# Altium PCB BloopPadMaxx_01.PcbDoc (part 3 of 3)
Units mm, origin at the board's own origin, x right, y up, seen from the top; angles counter-clockwise.
Board outline 209 x 212 mm, 2 copper layers (Top Layer, Bottom Layer), stack 1.571 mm thick; 206 components, 154 nets, 793 pads, 455 vias.
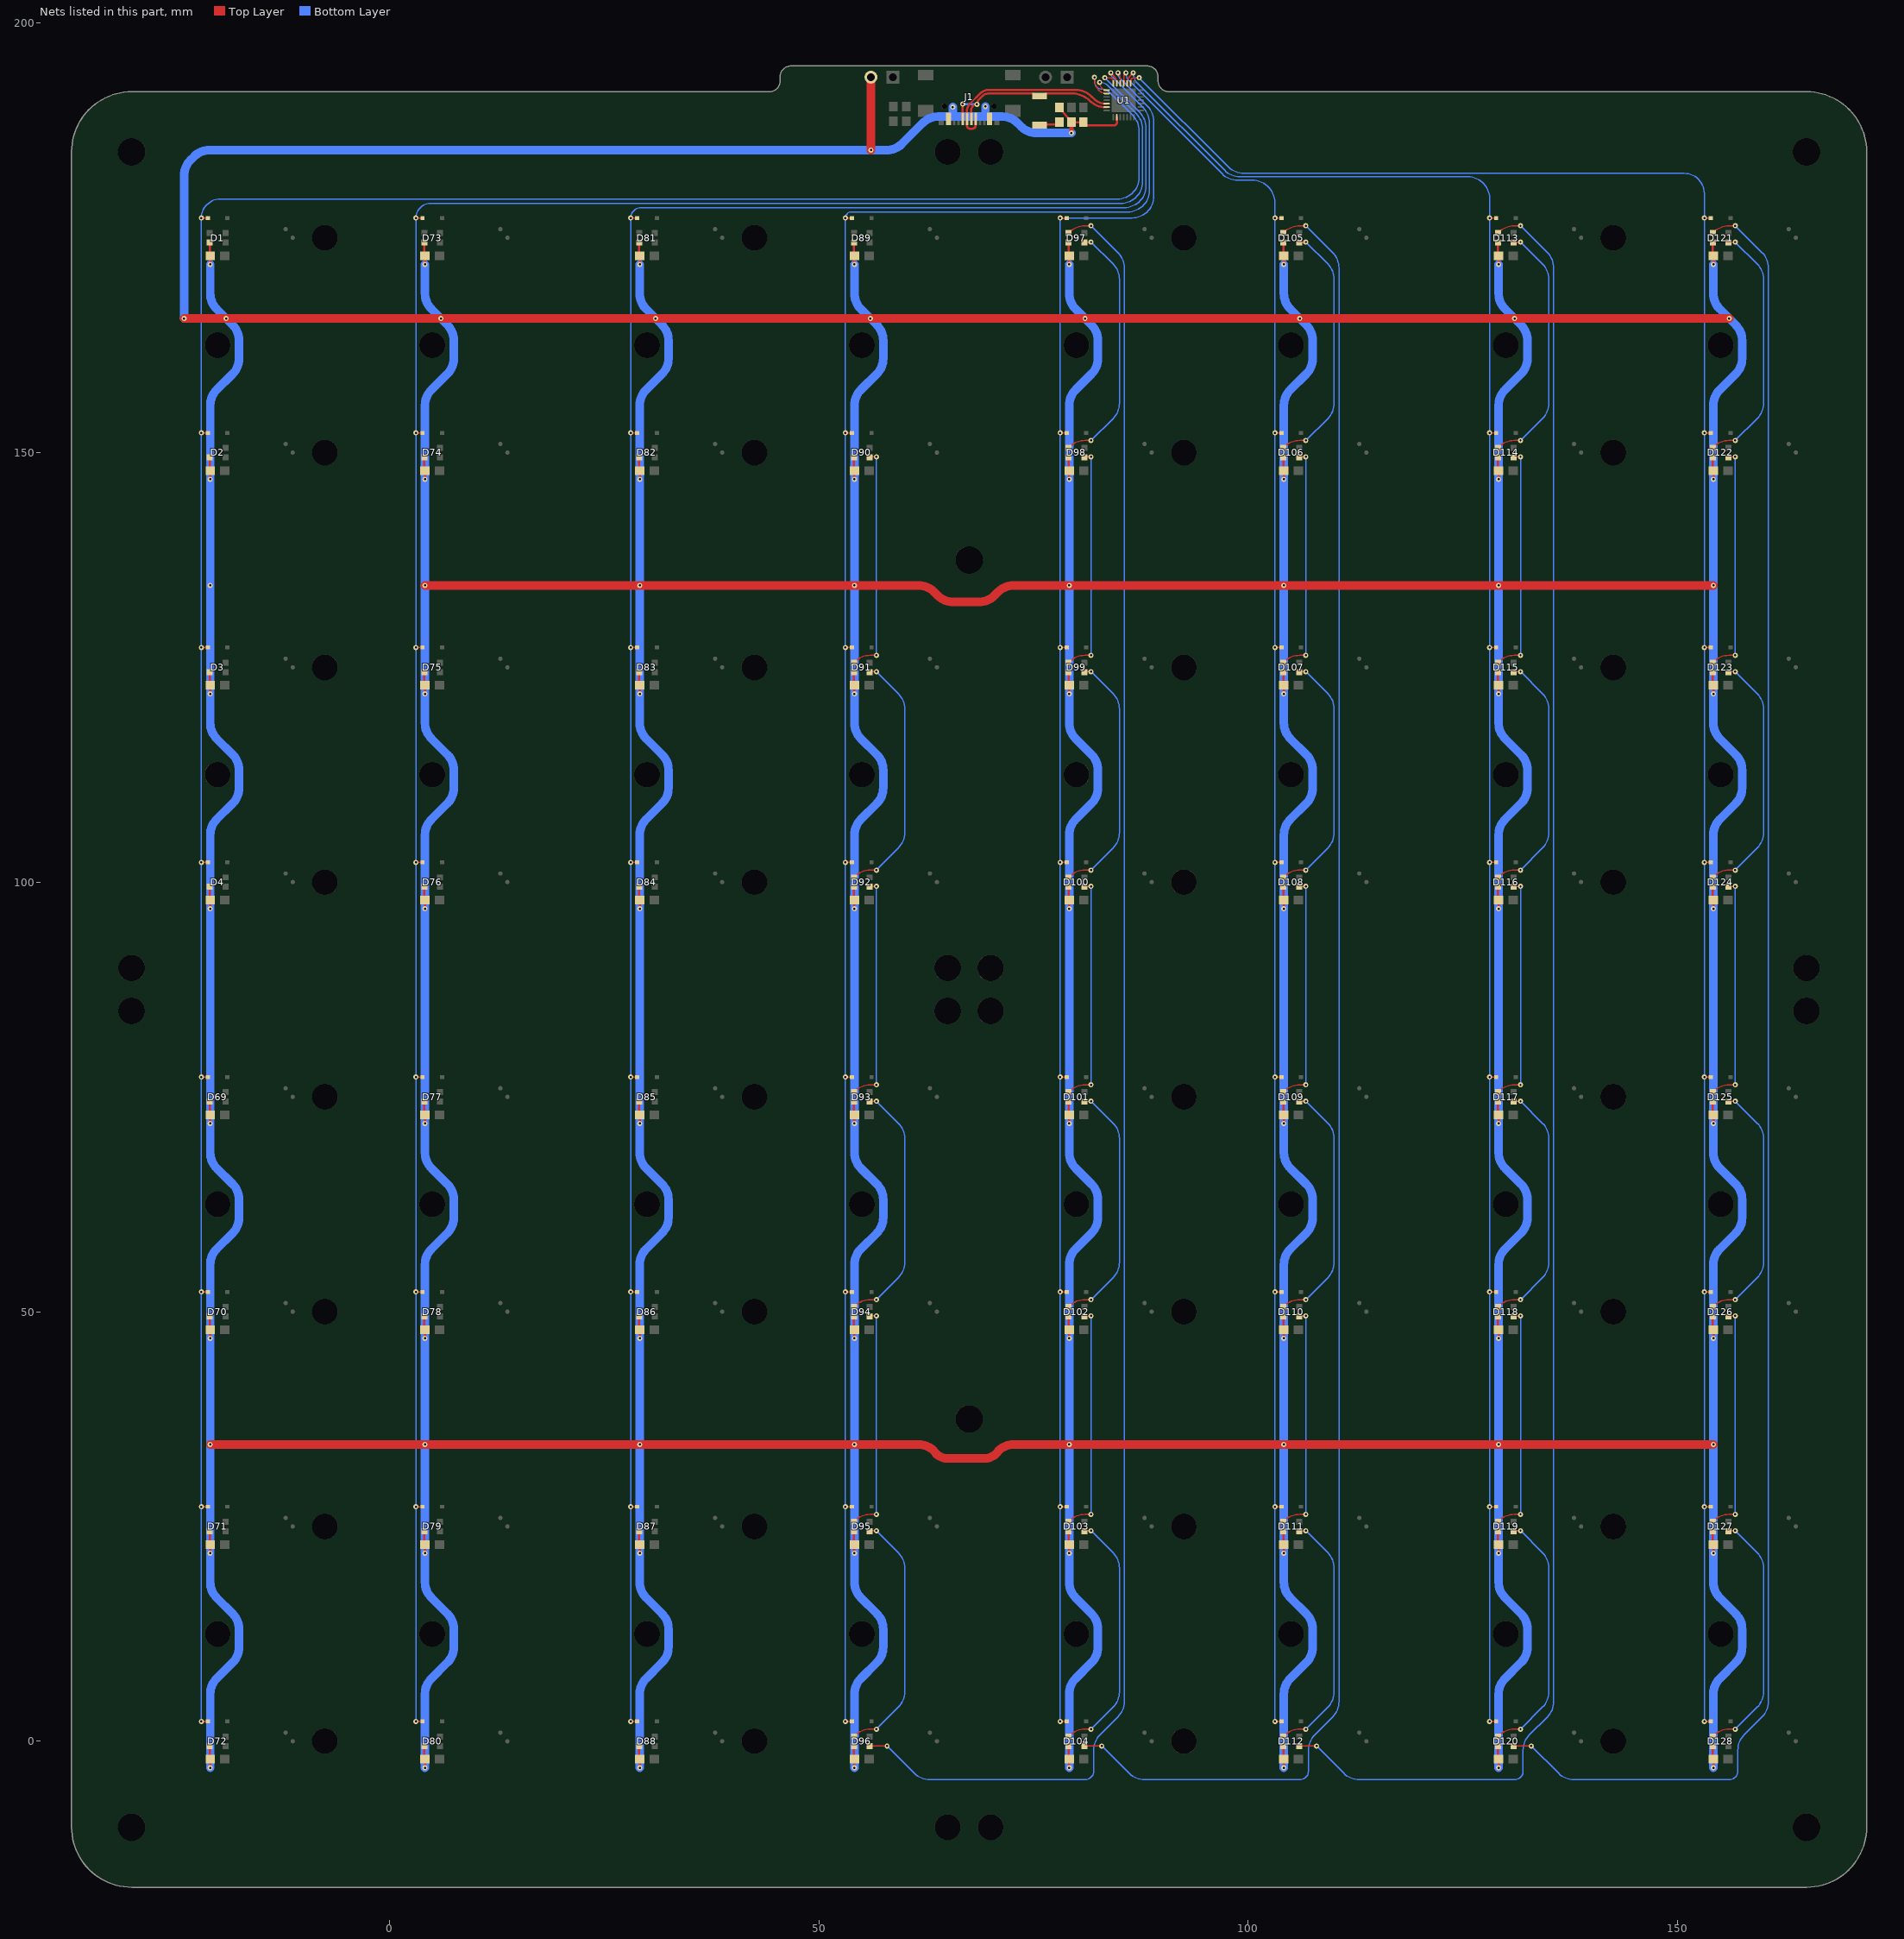
[diagram p3: the nets of this part, all layers, seen from the top]

## Via types
v1: diameter 0.6, hole 0.25, Top Layer to Bottom Layer, 455 vias

## Nets (pads, with @x,y where several pads share a name; then routed paths per layer and width w, separated by ;. In a path a pad name is that pad's centre, name@x,y a point inside that pad or via, vN(x,y) a via of type N, cw(c..) or ccw(c..) an arc to the next point about the centre after c; other vN are vias at no path point) (continued)
NetD90_1: D90.1 D91.3 | length 26.8
  Top Layer w0.15: D91.3@54.085,125.55 54.191,125.656 cw(c55.987,123.86) 55.987,126.4 v1(56.7,126.4) ; D90.1@55.915,149.45 55.965,149.5 v1(56.7,149.5)
  Bottom Layer w0.15: v1(56.7,126.4) v1(56.7,149.5)
NetD91_1: D91.1 D92.3 | length 29.3
  Top Layer w0.15: D92.3@54.085,100.55 54.191,100.656 cw(c55.987,98.86) 55.987,101.4 v1(56.7,101.4) ; D91.1@55.915,124.45 55.965,124.5 v1(56.7,124.5)
  Bottom Layer w0.15: v1(56.7,101.4) 59.256,103.956 ccw(c57.46,105.752) 60,105.752 60,120.148 ccw(c57.46,120.148) 59.256,121.944 v1(56.7,124.5)
NetD92_1: D92.1 D93.3 | length 26.8
  Top Layer w0.15: D93.3@54.085,75.55 54.191,75.656 cw(c55.987,73.86) 55.987,76.4 v1(56.7,76.4) ; D92.1@55.915,99.45 55.965,99.5 v1(56.7,99.5)
  Bottom Layer w0.15: v1(56.7,76.4) v1(56.7,99.5)
NetD93_1: D93.1 D94.3 | length 29.3
  Top Layer w0.15: D94.3@54.085,50.55 54.191,50.656 cw(c55.987,48.86) 55.987,51.4 v1(56.7,51.4) ; D93.1@55.915,74.45 55.965,74.5 v1(56.7,74.5)
  Bottom Layer w0.15: v1(56.7,51.4) 59.256,53.956 ccw(c57.46,55.752) 60,55.752 60,70.148 ccw(c57.46,70.148) 59.256,71.944 v1(56.7,74.5)
NetD94_1: D94.1 D95.3 | length 26.8
  Top Layer w0.15: D95.3@54.085,25.55 54.191,25.656 cw(c55.987,23.86) 55.987,26.4 v1(56.7,26.4) ; D94.1@55.915,49.45 55.965,49.5 v1(56.7,49.5)
  Bottom Layer w0.15: v1(56.7,26.4) v1(56.7,49.5)
NetD95_1: D95.1 D96.3 | length 29.3
  Top Layer w0.15: D96.3@54.085,0.55 54.191,0.656 cw(c55.987,-1.14) 55.987,1.4 v1(56.7,1.4) ; D95.1@55.915,24.45 55.965,24.5 v1(56.7,24.5)
  Bottom Layer w0.15: v1(56.7,1.4) 59.256,3.956 ccw(c57.46,5.752) 60,5.752 60,20.148 ccw(c57.46,20.148) 59.256,21.944 v1(56.7,24.5)
NetD96_1: D96.1 D97.3 | length 216.5
  Top Layer w0.15: D96.1@55.915,-0.55 v1(57.95,-0.55) ; D97.3@79.191,175.656 cw(c80.987,173.86) 80.987,176.4 ; D97.3@79.191,175.656 cw(c80.987,173.86) 80.987,176.4 ; D97.3@79.191,175.656 D97.3@79.085,175.55 D97.3@79.191,175.656 ; 80.987,176.4 v1(81.7,176.4) 80.987,176.4
  Bottom Layer w0.15: v1(57.95,-0.55) 61.122,-3.722 ccw(c62.918,-1.926) 62.918,-4.466 81.034,-4.466 ccw(c81.034,-3.5) 82,-3.5 82,-1.052 cw(c84.54,-1.052) 82.744,0.744 84.816,2.816 ccw(c83.02,4.612) 85.56,4.612 85.56,171.488 ccw(c83.02,171.488) 84.816,173.284 v1(81.7,176.4)
  other v1: 81.7,176.4
NetD97_1: D97.1 D98.3 | length 29.3
  Top Layer w0.15: D98.3@79.085,150.55 79.191,150.656 cw(c80.987,148.86) 80.987,151.4 v1(81.7,151.4) ; D97.1@80.915,174.45 80.965,174.5 v1(81.7,174.5)
  Bottom Layer w0.15: v1(81.7,151.4) 84.256,153.956 ccw(c82.46,155.752) 85,155.752 85,170.148 ccw(c82.46,170.148) 84.256,171.944 v1(81.7,174.5)
NetD98_1: D98.1 D99.3 | length 26.8
  Top Layer w0.15: D99.3@79.085,125.55 79.191,125.656 cw(c80.987,123.86) 80.987,126.4 v1(81.7,126.4) ; D98.1@80.915,149.45 80.965,149.5 v1(81.7,149.5)
  Bottom Layer w0.15: v1(81.7,126.4) v1(81.7,149.5)
NetD99_1: D99.1 D100.3 | length 29.3
  Top Layer w0.15: D100.3@79.085,100.55 79.191,100.656 cw(c80.987,98.86) 80.987,101.4 v1(81.7,101.4) ; D99.1@80.915,124.45 80.965,124.5 v1(81.7,124.5)
  Bottom Layer w0.15: v1(81.7,101.4) 84.256,103.956 ccw(c82.46,105.752) 85,105.752 85,120.148 ccw(c82.46,120.148) 84.256,121.944 v1(81.7,124.5)
NetD100_1: D100.1 D101.3 | length 26.8
  Top Layer w0.15: D101.3@79.085,75.55 79.191,75.656 cw(c80.987,73.86) 80.987,76.4 v1(81.7,76.4) ; D100.1@80.915,99.45 80.965,99.5 v1(81.7,99.5)
  Bottom Layer w0.15: v1(81.7,76.4) v1(81.7,99.5)
NetD101_1: D101.1 D102.3 | length 29.3
  Top Layer w0.15: D102.3@79.085,50.55 79.191,50.656 cw(c80.987,48.86) 80.987,51.4 v1(81.7,51.4) ; D101.1@80.915,74.45 80.965,74.5 v1(81.7,74.5)
  Bottom Layer w0.15: v1(81.7,51.4) 84.256,53.956 ccw(c82.46,55.752) 85,55.752 85,70.148 ccw(c82.46,70.148) 84.256,71.944 v1(81.7,74.5)
NetD102_1: D102.1 D103.3 | length 26.8
  Top Layer w0.15: D103.3@79.085,25.55 79.191,25.656 cw(c80.987,23.86) 80.987,26.4 v1(81.7,26.4) ; D102.1@80.915,49.45 80.965,49.5 v1(81.7,49.5)
  Bottom Layer w0.15: v1(81.7,26.4) v1(81.7,49.5)
NetD103_1: D103.1 D104.3 | length 29.3
  Top Layer w0.15: D104.3@79.085,0.55 79.191,0.656 cw(c80.987,-1.14) 80.987,1.4 v1(81.7,1.4) ; D103.1@80.915,24.45 80.965,24.5 v1(81.7,24.5)
  Bottom Layer w0.15: v1(81.7,1.4) 84.256,3.956 ccw(c82.46,5.752) 85,5.752 85,20.148 ccw(c82.46,20.148) 84.256,21.944 v1(81.7,24.5)
NetD104_1: D104.1 D105.3 | length 216.5
  Top Layer w0.15: D104.1@80.915,-0.55 v1(82.95,-0.55) ; D105.3@104.191,175.656 cw(c105.987,173.86) 105.987,176.4 ; D105.3@104.191,175.656 cw(c105.987,173.86) 105.987,176.4 ; D105.3@104.191,175.656 D105.3@104.085,175.55 D105.3@104.191,175.656 ; 105.987,176.4 v1(106.7,176.4) 105.987,176.4
  Bottom Layer w0.15: v1(82.95,-0.55) 86.122,-3.722 ccw(c87.918,-1.926) 87.918,-4.466 106.034,-4.466 ccw(c106.034,-3.5) 107,-3.5 107,-1.052 cw(c109.54,-1.052) 107.744,0.744 109.816,2.816 ccw(c108.02,4.612) 110.56,4.612 110.56,171.488 ccw(c108.02,171.488) 109.816,173.284 v1(106.7,176.4)
  other v1: 106.7,176.4
NetD105_1: D105.1 D106.3 | length 29.3
  Top Layer w0.15: D106.3@104.085,150.55 104.191,150.656 cw(c105.987,148.86) 105.987,151.4 v1(106.7,151.4) ; D105.1@105.915,174.45 105.965,174.5 v1(106.7,174.5)
  Bottom Layer w0.15: v1(106.7,151.4) 109.256,153.956 ccw(c107.46,155.752) 110,155.752 110,170.148 ccw(c107.46,170.148) 109.256,171.944 v1(106.7,174.5)
NetD106_1: D106.1 D107.3 | length 26.8
  Top Layer w0.15: D107.3@104.085,125.55 104.191,125.656 cw(c105.987,123.86) 105.987,126.4 v1(106.7,126.4) ; D106.1@105.915,149.45 105.965,149.5 v1(106.7,149.5)
  Bottom Layer w0.15: v1(106.7,126.4) v1(106.7,149.5)
NetD107_1: D107.1 D108.3 | length 29.3
  Top Layer w0.15: D108.3@104.085,100.55 104.191,100.656 cw(c105.987,98.86) 105.987,101.4 v1(106.7,101.4) ; D107.1@105.915,124.45 105.965,124.5 v1(106.7,124.5)
  Bottom Layer w0.15: v1(106.7,101.4) 109.256,103.956 ccw(c107.46,105.752) 110,105.752 110,120.148 ccw(c107.46,120.148) 109.256,121.944 v1(106.7,124.5)
NetD108_1: D108.1 D109.3 | length 26.8
  Top Layer w0.15: D109.3@104.085,75.55 104.191,75.656 cw(c105.987,73.86) 105.987,76.4 v1(106.7,76.4) ; D108.1@105.915,99.45 105.965,99.5 v1(106.7,99.5)
  Bottom Layer w0.15: v1(106.7,76.4) v1(106.7,99.5)
NetD109_1: D109.1 D110.3 | length 29.3
  Top Layer w0.15: D110.3@104.085,50.55 104.191,50.656 cw(c105.987,48.86) 105.987,51.4 v1(106.7,51.4) ; D109.1@105.915,74.45 105.965,74.5 v1(106.7,74.5)
  Bottom Layer w0.15: v1(106.7,51.4) 109.256,53.956 ccw(c107.46,55.752) 110,55.752 110,70.148 ccw(c107.46,70.148) 109.256,71.944 v1(106.7,74.5)
NetD110_1: D110.1 D111.3 | length 26.8
  Top Layer w0.15: D111.3@104.085,25.55 104.191,25.656 cw(c105.987,23.86) 105.987,26.4 v1(106.7,26.4) ; D110.1@105.915,49.45 105.965,49.5 v1(106.7,49.5)
  Bottom Layer w0.15: v1(106.7,26.4) v1(106.7,49.5)
NetD111_1: D111.1 D112.3 | length 29.3
  Top Layer w0.15: D112.3@104.085,0.55 104.191,0.656 cw(c105.987,-1.14) 105.987,1.4 v1(106.7,1.4) ; D111.1@105.915,24.45 105.965,24.5 v1(106.7,24.5)
  Bottom Layer w0.15: v1(106.7,1.4) 109.256,3.956 ccw(c107.46,5.752) 110,5.752 110,20.148 ccw(c107.46,20.148) 109.256,21.944 v1(106.7,24.5)
NetD112_1: D112.1 D113.3 | length 216.5
  Top Layer w0.15: D112.1@105.915,-0.55 v1(107.95,-0.55) ; D113.3@129.191,175.656 cw(c130.987,173.86) 130.987,176.4 ; D113.3@129.191,175.656 cw(c130.987,173.86) 130.987,176.4 ; D113.3@129.191,175.656 D113.3@129.085,175.55 D113.3@129.191,175.656 ; 130.987,176.4 v1(131.7,176.4) 130.987,176.4
  Bottom Layer w0.15: v1(107.95,-0.55) 111.122,-3.722 ccw(c112.918,-1.926) 112.918,-4.466 131.034,-4.466 ccw(c131.034,-3.5) 132,-3.5 132,-1.052 cw(c134.54,-1.052) 132.744,0.744 134.816,2.816 ccw(c133.02,4.612) 135.56,4.612 135.56,171.488 ccw(c133.02,171.488) 134.816,173.284 v1(131.7,176.4)
  other v1: 131.7,176.4
NetD113_1: D113.1 D114.3 | length 29.3
  Top Layer w0.15: D114.3@129.085,150.55 129.191,150.656 cw(c130.987,148.86) 130.987,151.4 v1(131.7,151.4) ; D113.1@130.915,174.45 130.965,174.5 v1(131.7,174.5)
  Bottom Layer w0.15: v1(131.7,151.4) 134.256,153.956 ccw(c132.46,155.752) 135,155.752 135,170.148 ccw(c132.46,170.148) 134.256,171.944 v1(131.7,174.5)
NetD114_1: D114.1 D115.3 | length 26.8
  Top Layer w0.15: D115.3@129.085,125.55 129.191,125.656 cw(c130.987,123.86) 130.987,126.4 v1(131.7,126.4) ; D114.1@130.915,149.45 130.965,149.5 v1(131.7,149.5)
  Bottom Layer w0.15: v1(131.7,126.4) v1(131.7,149.5)
NetD115_1: D115.1 D116.3 | length 29.3
  Top Layer w0.15: D116.3@129.085,100.55 129.191,100.656 cw(c130.987,98.86) 130.987,101.4 v1(131.7,101.4) ; D115.1@130.915,124.45 130.965,124.5 v1(131.7,124.5)
  Bottom Layer w0.15: v1(131.7,101.4) 134.256,103.956 ccw(c132.46,105.752) 135,105.752 135,120.148 ccw(c132.46,120.148) 134.256,121.944 v1(131.7,124.5)
NetD116_1: D116.1 D117.3 | length 26.8
  Top Layer w0.15: D117.3@129.085,75.55 129.191,75.656 cw(c130.987,73.86) 130.987,76.4 v1(131.7,76.4) ; D116.1@130.915,99.45 130.965,99.5 v1(131.7,99.5)
  Bottom Layer w0.15: v1(131.7,76.4) v1(131.7,99.5)
NetD117_1: D117.1 D118.3 | length 29.3
  Top Layer w0.15: D118.3@129.085,50.55 129.191,50.656 cw(c130.987,48.86) 130.987,51.4 v1(131.7,51.4) ; D117.1@130.915,74.45 130.965,74.5 v1(131.7,74.5)
  Bottom Layer w0.15: v1(131.7,51.4) 134.256,53.956 ccw(c132.46,55.752) 135,55.752 135,70.148 ccw(c132.46,70.148) 134.256,71.944 v1(131.7,74.5)
NetD118_1: D118.1 D119.3 | length 26.8
  Top Layer w0.15: D119.3@129.085,25.55 129.191,25.656 cw(c130.987,23.86) 130.987,26.4 v1(131.7,26.4) ; D118.1@130.915,49.45 130.965,49.5 v1(131.7,49.5)
  Bottom Layer w0.15: v1(131.7,26.4) v1(131.7,49.5)
NetD119_1: D119.1 D120.3 | length 29.3
  Top Layer w0.15: D120.3@129.085,0.55 129.191,0.656 cw(c130.987,-1.14) 130.987,1.4 v1(131.7,1.4) ; D119.1@130.915,24.45 130.965,24.5 v1(131.7,24.5)
  Bottom Layer w0.15: v1(131.7,1.4) 134.256,3.956 ccw(c132.46,5.752) 135,5.752 135,20.148 ccw(c132.46,20.148) 134.256,21.944 v1(131.7,24.5)
NetD120_1: D120.1 D121.3 | length 216.5
  Top Layer w0.15: D120.1@130.915,-0.55 v1(132.95,-0.55) ; D121.3@154.191,175.656 cw(c155.987,173.86) 155.987,176.4 ; D121.3@154.191,175.656 cw(c155.987,173.86) 155.987,176.4 ; D121.3@154.191,175.656 D121.3@154.085,175.55 D121.3@154.191,175.656 ; 155.987,176.4 v1(156.7,176.4) 155.987,176.4
  Bottom Layer w0.15: v1(132.95,-0.55) 136.122,-3.722 ccw(c137.918,-1.926) 137.918,-4.466 156.034,-4.466 ccw(c156.034,-3.5) 157,-3.5 157,-1.052 cw(c159.54,-1.052) 157.744,0.744 159.816,2.816 ccw(c158.02,4.612) 160.56,4.612 160.56,171.488 ccw(c158.02,171.488) 159.816,173.284 v1(156.7,176.4)
  other v1: 156.7,176.4
NetD121_1: D121.1 D122.3 | length 29.3
  Top Layer w0.15: D122.3@154.085,150.55 154.191,150.656 cw(c155.987,148.86) 155.987,151.4 v1(156.7,151.4) ; D121.1@155.915,174.45 155.965,174.5 v1(156.7,174.5)
  Bottom Layer w0.15: v1(156.7,151.4) 159.256,153.956 ccw(c157.46,155.752) 160,155.752 160,170.148 ccw(c157.46,170.148) 159.256,171.944 v1(156.7,174.5)
NetD122_1: D122.1 D123.3 | length 26.8
  Top Layer w0.15: D123.3@154.085,125.55 154.191,125.656 cw(c155.987,123.86) 155.987,126.4 v1(156.7,126.4) ; D122.1@155.915,149.45 155.965,149.5 v1(156.7,149.5)
  Bottom Layer w0.15: v1(156.7,126.4) v1(156.7,149.5)
NetD123_1: D123.1 D124.3 | length 29.3
  Top Layer w0.15: D124.3@154.085,100.55 154.191,100.656 cw(c155.987,98.86) 155.987,101.4 v1(156.7,101.4) ; D123.1@155.915,124.45 155.965,124.5 v1(156.7,124.5)
  Bottom Layer w0.15: v1(156.7,101.4) 159.256,103.956 ccw(c157.46,105.752) 160,105.752 160,120.148 ccw(c157.46,120.148) 159.256,121.944 v1(156.7,124.5)
NetD124_1: D124.1 D125.3 | length 26.8
  Top Layer w0.15: D125.3@154.085,75.55 154.191,75.656 cw(c155.987,73.86) 155.987,76.4 v1(156.7,76.4) ; D124.1@155.915,99.45 155.965,99.5 v1(156.7,99.5)
  Bottom Layer w0.15: v1(156.7,76.4) v1(156.7,99.5)
NetD125_1: D125.1 D126.3 | length 29.3
  Top Layer w0.15: D126.3@154.085,50.55 154.191,50.656 cw(c155.987,48.86) 155.987,51.4 v1(156.7,51.4) ; D125.1@155.915,74.45 155.965,74.5 v1(156.7,74.5)
  Bottom Layer w0.15: v1(156.7,51.4) 159.256,53.956 ccw(c157.46,55.752) 160,55.752 160,70.148 ccw(c157.46,70.148) 159.256,71.944 v1(156.7,74.5)
NetD126_1: D126.1 D127.3 | length 26.8
  Top Layer w0.15: D127.3@154.085,25.55 154.191,25.656 cw(c155.987,23.86) 155.987,26.4 v1(156.7,26.4) ; D126.1@155.915,49.45 155.965,49.5 v1(156.7,49.5)
  Bottom Layer w0.15: v1(156.7,26.4) v1(156.7,49.5)
NetD127_1: D127.1 D128.3 | length 29.3
  Top Layer w0.15: D128.3@154.085,0.55 154.191,0.656 cw(c155.987,-1.14) 155.987,1.4 v1(156.7,1.4) ; D127.1@155.915,24.45 155.965,24.5 v1(156.7,24.5)
  Bottom Layer w0.15: v1(156.7,1.4) 159.256,3.956 ccw(c157.46,5.752) 160,5.752 160,20.148 ccw(c157.46,20.148) 159.256,21.944 v1(156.7,24.5)
NetR1_2: R1.2 SW1.1 | length 2.6
  Top Layer w0.25: SW1.1@75.7,188.1 75.8,188.2 78,188.2 R1.2@78,188.45
ROW0: D17.A D18.A D33.A D34.A D49.A D50.A D65.A D66.A U1.23 | length 309.8
  Top Layer w0.15: v1(-21.9,2.3) D66.A@-21.14,2.3 ; v1(-21.9,27.3) D50.A@-21.14,27.3 ; v1(-21.9,52.3) D34.A@-21.14,52.3 ; v1(-21.9,77.3) D18.A@-21.14,77.3 ; v1(-21.9,102.3) D65.A@-21.14,102.3 ; v1(-21.9,127.3) D49.A@-21.14,127.3 ; v1(-21.9,152.3) D33.A@-21.14,152.3 ; v1(-21.9,177.3) D17.A@-21.14,177.3 ; v1(82.1,193.679) 82.1,193.469 ccw(c84.041,193.469) 82.669,192.096 ccw(c83.384,192.811) 83.384,191.8 U1.23@83.525,191.8 U1.23@83.6,191.8
  Bottom Layer w0.15: v1(-21.9,2.3) v1(-21.9,27.3) v1(-21.9,52.3) v1(-21.9,77.3) v1(-21.9,102.3) v1(-21.9,127.3) v1(-21.9,152.3) v1(-21.9,177.3) cw(c-19.7,177.3) -19.7,179.5 70.948,179.5 84.76,179.5 ccw(c84.76,182.04) 87.3,182.04 87.3,185.04 87.3,187.448 ccw(c84.76,187.448) 86.556,189.244 83.936,191.864 ccw(c82.826,190.753) 82.826,192.323 cw(c82.826,192.926) 82.4,192.5 cw(c83.124,193.224) 82.1,193.224 v1(82.1,193.679)
ROW1: D13.A D14.A D29.A D30.A D45.A D46.A D61.A D62.A U1.22 | length 283.4
  Top Layer w0.15: v1(3.1,2.3) D62.A@3.86,2.3 ; v1(3.1,27.3) D46.A@3.86,27.3 ; v1(3.1,52.3) D30.A@3.86,52.3 ; v1(3.1,77.3) D14.A@3.86,77.3 ; v1(3.1,102.3) D61.A@3.86,102.3 ; v1(3.1,127.3) D45.A@3.86,127.3 ; v1(3.1,152.3) D29.A@3.86,152.3 ; v1(3.1,177.3) D13.A@3.86,177.3 ; v1(82.7,193.1) 82.7,193.003 ccw(c83.487,193.003) 82.93,192.446 ccw(c83.525,193.041) U1.22@83.525,192.2
  Bottom Layer w0.15: v1(3.1,2.3) v1(3.1,27.3) v1(3.1,52.3) v1(3.1,77.3) v1(3.1,102.3) v1(3.1,127.3) v1(3.1,152.3) v1(3.1,177.3) cw(c4.8,177.3) 4.8,179 71.448,179 85.16,179 ccw(c85.16,181.54) 87.7,181.54 87.7,184.64 87.7,187.648 ccw(c85.16,187.648) 86.956,189.444 83.983,192.417 83.724,192.676 ccw(c82.7,191.651) v1@82.804,193.096 ; v1@82.804,193.096 ccw(c82.7,191.651) v1(82.7,193.1) 82.8,193.1 v1@82.804,193.096
ROW2: D9.A D10.A D25.A D26.A D41.A D42.A D57.A D58.A U1.21 | length 259.2
  Top Layer w0.15: v1(28.1,2.3) D58.A@28.86,2.3 ; v1(28.1,27.3) D42.A@28.86,27.3 ; v1(28.1,52.3) D26.A@28.86,52.3 ; v1(28.1,77.3) D10.A@28.86,77.3 ; v1(28.1,102.3) D57.A@28.86,102.3 ; v1(28.1,127.3) D41.A@28.86,127.3 ; v1(28.1,152.3) D25.A@28.86,152.3 ; v1(28.1,177.3) D9.A@28.86,177.3 ; v1(83.297,193.631) 83.853,193.631 cw(c83.853,193.184) 84.3,193.184 U1.21@84.3,192.975
  Bottom Layer w0.15: v1(28.1,2.3) v1(28.1,27.3) v1(28.1,52.3) v1(28.1,77.3) v1(28.1,102.3) v1(28.1,127.3) v1(28.1,152.3) v1(28.1,177.3) cw(c29.3,177.3) 29.3,178.5 85.56,178.5 ccw(c85.56,181.04) 88.1,181.04 88.1,187.775 ccw(c85.56,187.775) 87.356,189.571 v1(83.297,193.631)
ROW3: D5.A D6.A D21.A D22.A D37.A D38.A D53.A D54.A U1.20 | length 235.2
  Top Layer w0.15: v1(53.1,2.3) D54.A@53.86,2.3 ; v1(53.1,27.3) D38.A@53.86,27.3 ; v1(53.1,52.3) D22.A@53.86,52.3 ; v1(53.1,77.3) D6.A@53.86,77.3 ; v1(53.1,102.3) D53.A@53.86,102.3 ; v1(53.1,127.3) D37.A@53.86,127.3 ; v1(53.1,152.3) D21.A@53.86,152.3 ; v1(53.1,177.3) D5.A@53.86,177.3 ; v1(84,194.2) 84.329,193.871 cw(c83.433,192.975) U1.20@84.7,192.975
  Bottom Layer w0.15: v1(53.1,2.3) v1(53.1,27.3) v1(53.1,52.3) v1(53.1,77.3) v1(53.1,102.3) v1(53.1,127.3) v1(53.1,152.3) v1(53.1,177.3) cw(c53.8,177.3) 53.8,178 85.96,178 ccw(c85.96,180.54) 88.5,180.54 88.5,188.348 ccw(c85.96,188.348) 87.756,190.144 84.212,193.688 cw(c84.724,194.2) v1(84,194.2)
ROW4: D19.A D20.A D35.A D36.A D51.A D52.A D67.A D68.A U1.19 | length 210.6
  Top Layer w0.15: v1(78.1,2.3) D68.A@78.86,2.3 ; v1(78.1,27.3) D52.A@78.86,27.3 ; v1(78.1,52.3) D36.A@78.86,52.3 ; v1(78.1,77.3) D20.A@78.86,77.3 ; v1(78.1,102.3) D67.A@78.86,102.3 ; v1(78.1,127.3) D51.A@78.86,127.3 ; v1(78.1,152.3) D35.A@78.86,152.3 ; v1(78.1,177.3) D19.A@78.86,177.3 ; v1(84.839,194.196) cw(c84.208,193.566) 85.1,193.566 U1.19@85.1,192.975
  Bottom Layer w0.15: v1(78.1,2.3) v1(78.1,27.3) v1(78.1,52.3) v1(78.1,77.3) v1(78.1,102.3) v1(78.1,127.3) v1(78.1,152.3) v1(78.1,177.3) 86.46,177.3 ccw(c86.46,179.84) 89,179.84 89,188.548 ccw(c86.46,188.548) 88.256,190.344 85.146,193.454 cw(c85.889,194.196) v1(84.839,194.196)
ROW5: D15.A D16.A D31.A D32.A D47.A D48.A D63.A D64.A U1.18 | length 208.3
  Top Layer w0.15: U1.18@85.5,192.975 85.5,193.566 cw(c86.392,193.566) v1(85.761,194.196) ; v1(103.1,2.3) D64.A@103.86,2.3 ; v1(103.1,27.3) D48.A@103.86,27.3 ; v1(103.1,52.3) D32.A@103.86,52.3 ; v1(103.1,77.3) D16.A@103.86,77.3 ; v1(103.1,102.3) D63.A@103.86,102.3 ; v1(103.1,127.3) D47.A@103.86,127.3 ; v1(103.1,152.3) D31.A@103.86,152.3 ; v1(103.1,177.3) D15.A@103.86,177.3
  Bottom Layer w0.15: v1(85.761,194.196) ccw(c87.107,194.196) 86.156,193.244 96.956,182.444 ccw(c98.752,184.24) 98.752,181.7 100.46,181.7 cw(c100.46,179.06) 103.1,179.06 v1(103.1,177.3) v1(103.1,152.3) v1(103.1,127.3) v1(103.1,102.3) v1(103.1,77.3) v1(103.1,52.3) v1(103.1,27.3) v1(103.1,2.3)
ROW6: D11.A D12.A D27.A D28.A D43.A D44.A D59.A D60.A U1.17 | length 233
  Top Layer w0.15: U1.17@85.9,192.975 cw(c87.167,192.975) 86.271,193.871 v1(86.6,194.2) ; v1(128.1,2.3) D60.A@128.86,2.3 ; v1(128.1,27.3) D44.A@128.86,27.3 ; v1(128.1,52.3) D28.A@128.86,52.3 ; v1(128.1,77.3) D12.A@128.86,77.3 ; v1(128.1,102.3) D59.A@128.86,102.3 ; v1(128.1,127.3) D43.A@128.86,127.3 ; v1(128.1,152.3) D27.A@128.86,152.3 ; v1(128.1,177.3) D11.A@128.86,177.3
  Bottom Layer w0.15: v1(86.6,194.2) ccw(c88.304,194.2) 87.099,192.995 97.25,182.844 ccw(c99.046,184.64) 99.046,182.1 99.791,182.1 125.56,182.1 cw(c125.56,179.56) 128.1,179.56 v1(128.1,177.3) v1(128.1,152.3) v1(128.1,127.3) v1(128.1,102.3) v1(128.1,77.3) v1(128.1,52.3) v1(128.1,27.3) v1(128.1,2.3)
ROW7: D7.A D8.A D23.A D24.A D39.A D40.A D55.A D56.A U1.16 | length 257
  Top Layer w0.15: U1.16@86.3,192.975 86.3,193.184 cw(c86.747,193.184) 86.747,193.631 v1(87.303,193.631) ; v1(153.1,2.3) D56.A@153.86,2.3 ; v1(153.1,27.3) D40.A@153.86,27.3 ; v1(153.1,52.3) D24.A@153.86,52.3 ; v1(153.1,77.3) D8.A@153.86,77.3 ; v1(153.1,102.3) D55.A@153.86,102.3 ; v1(153.1,127.3) D39.A@153.86,127.3 ; v1(153.1,152.3) D23.A@153.86,152.3 ; v1(153.1,177.3) D7.A@153.86,177.3
  Bottom Layer w0.15: v1(87.303,193.631) 97.69,183.244 ccw(c99.486,185.04) 99.486,182.5 102.024,182.5 150.76,182.5 cw(c150.76,180.16) 153.1,180.16 v1(153.1,177.3) v1(153.1,152.3) v1(153.1,127.3) v1(153.1,102.3) v1(153.1,77.3) v1(153.1,52.3) v1(153.1,27.3) v1(153.1,2.3)
USB.D_n: J1.A7 J1.B7 U1.26 | length 21.8
  Top Layer w0.25: J1.B7@68.25,188.853 68.25,188.05 cw(c67.9,188.05) 67.9,187.7 67.6,187.7 cw(c67.6,188.05) 67.25,188.05 J1.A7@67.25,188.853 67.25,189.703 cw(c68.587,189.703) 67.642,190.648 68.804,191.811 cw(c69.731,190.884) 69.731,192.195 79.934,192.195 cw(c79.934,189.655) 81.73,191.451 81.775,191.406 cw(c79.621,188.821) 82,191.2 ccw(c83.449,192.649) 83.449,190.6 U1.26@83.525,190.6
USB.D_p: J1.A6 J1.B6 SW1.2 U1.27 | length 21.8
  Top Layer w0.25: J1.B6@66.75,188.853 v1(66.75,190.55) ; J1.A6@67.75,188.853 67.75,189.886 cw(c68.4,189.886) v1(68.4,190.536) cw(c69.136,190.536) 68.616,191.056 69.087,191.528 cw(c69.709,190.906) 69.709,191.785 74.975,191.785 74.975,191.775 75.25,191.5 76.15,191.5 76.445,191.795 79.503,191.795 cw(c79.503,188.89) 81.556,190.944 ccw(c83.352,192.74) 83.352,190.2 U1.27@83.525,190.2
  Bottom Layer w0.25: v1(66.75,190.55) ccw(c66.784,190.584) 66.784,190.536 v1(68.4,190.536)
VUSB: C1.1 C2.1 C3.1 C4.1 C5.1 C6.1 C7.1 C8.1 C9.1 C10.1 C11.1 C12.1 C13.1 C14.1 C15.1 C16.1 C17.1 C18.1 C19.1 C20.1 C21.1 C22.1 C23.1 C24.1 C25.1 C26.1 C27.1 C28.1 C29.1 C30.1 C31.1 C32.1 C33.1 C34.1 C35.1 C36.1 C37.1 C38.1 C39.1 C40.1 C41.1 C42.1 C43.1 C44.1 C45.1 C46.1 C47.1 C48.1 C49.1 C50.1 C51.1 C52.1 C53.1 C54.1 C55.1 C56.1 C57.1 C58.1 C59.1 C60.1 C61.1 C62.1 C63.1 C64.1 C65.1 C66.1 D1.4 D2.4 D3.4 D4.4 D69.4 D70.4 D71.4 D72.4 D73.4 D74.4 D75.4 D76.4 D77.4 D78.4 D79.4 D80.4 D81.4 D82.4 D83.4 D84.4 D85.4 D86.4 D87.4 D88.4 D89.4 D90.4 D91.4 D92.4 D93.4 D94.4 D95.4 D96.4 D97.4 D98.4 D99.4 D100.4 D101.4 D102.4 D103.4 D104.4 D105.4 D106.4 D107.4 D108.4 D109.4 D110.4 D111.4 D112.4 D113.4 D114.4 D115.4 D116.4 D117.4 D118.4 D119.4 D120.4 D121.4 D122.4 D123.4 D124.4 D125.4 D126.4 D127.4 D128.4 J1.A4 J1.A9 J1.B4 J1.B9 P2.2 R1.1 U1.2 | length 2291.5
  Top Layer w0.25: D72.4@-20.915,-0.55 -20.915,-2.035 ccw(c-20.85,-2.035) C59.1@-20.85,-2.1 v1(-20.85,-3.1) ; D71.4@-20.915,24.45 -20.915,22.965 ccw(c-20.85,22.965) C51.1@-20.85,22.9 v1(-20.85,21.9) ; D70.4@-20.915,49.45 -20.915,47.965 ccw(c-20.85,47.965) C43.1@-20.85,47.9 v1(-20.85,46.9) ; D69.4@-20.915,74.45 -20.915,72.965 ccw(c-20.85,72.965) C35.1@-20.85,72.9 v1(-20.85,71.9) ; D4.4@-20.915,99.45 -20.915,97.965 ccw(c-20.85,97.965) C27.1@-20.85,97.9 v1(-20.85,96.9) ; D3.4@-20.915,124.45 -20.915,122.965 ccw(c-20.85,122.965) C19.1@-20.85,122.9 v1(-20.85,121.9) ; D2.4@-20.915,149.45 -20.915,147.965 ccw(c-20.85,147.965) C9.1@-20.85,147.9 v1(-20.85,146.9) ; D1.4@-20.915,174.45 -20.915,172.965 ccw(c-20.85,172.965) C1.1@-20.85,172.9 v1(-20.85,171.9) ; D80.4@4.085,-0.55 4.085,-2.035 ccw(c4.15,-2.035) C60.1@4.15,-2.1 v1(4.15,-3.1) ; D79.4@4.085,24.45 4.085,22.965 ccw(c4.15,22.965) C52.1@4.15,22.9 v1(4.15,21.9) ; D78.4@4.085,49.45 4.085,47.965 ccw(c4.15,47.965) C44.1@4.15,47.9 v1(4.15,46.9) ; D77.4@4.085,74.45 4.085,72.965 ccw(c4.15,72.965) C36.1@4.15,72.9 v1(4.15,71.9) ; D76.4@4.085,99.45 4.085,97.965 ccw(c4.15,97.965) C28.1@4.15,97.9 v1(4.15,96.9) ; D75.4@4.085,124.45 4.085,122.965 ccw(c4.15,122.965) C20.1@4.15,122.9 v1(4.15,121.9) ; D74.4@4.085,149.45 4.085,147.965 ccw(c4.15,147.965) C10.1@4.15,147.9 v1(4.15,146.9) ; D73.4@4.085,174.45 4.085,172.965 ccw(c4.15,172.965) C2.1@4.15,172.9 v1(4.15,171.9) ; D88.4@29.085,-0.55 29.085,-2.035 ccw(c29.15,-2.035) C61.1@29.15,-2.1 v1(29.15,-3.1) ; D87.4@29.085,24.45 29.085,22.965 ccw(c29.15,22.965) C53.1@29.15,22.9 v1(29.15,21.9) ; D86.4@29.085,49.45 29.085,47.965 ccw(c29.15,47.965) C45.1@29.15,47.9 v1(29.15,46.9) ; D85.4@29.085,74.45 29.085,72.965 ccw(c29.15,72.965) C37.1@29.15,72.9 v1(29.15,71.9) ; D84.4@29.085,99.45 29.085,97.965 ccw(c29.15,97.965) C29.1@29.15,97.9 v1(29.15,96.9) ; D83.4@29.085,124.45 29.085,122.965 ccw(c29.15,122.965) C21.1@29.15,122.9 v1(29.15,121.9) ; D82.4@29.085,149.45 29.085,147.965 ccw(c29.15,147.965) C11.1@29.15,147.9 v1(29.15,146.9) ; D81.4@29.085,174.45 29.085,172.965 ccw(c29.15,172.965) C3.1@29.15,172.9 v1(29.15,171.9) ; D96.4@54.085,-0.55 54.085,-2.035 ccw(c54.15,-2.035) C62.1@54.15,-2.1 v1(54.15,-3.1) ; D95.4@54.085,24.45 54.085,22.965 ccw(c54.15,22.965) C54.1@54.15,22.9 v1(54.15,21.9) ; D94.4@54.085,49.45 54.085,47.965 ccw(c54.15,47.965) C46.1@54.15,47.9 v1(54.15,46.9) ; D93.4@54.085,74.45 54.085,72.965 ccw(c54.15,72.965) C38.1@54.15,72.9 v1(54.15,71.9) ; D92.4@54.085,99.45 54.085,97.965 ccw(c54.15,97.965) C30.1@54.15,97.9 v1(54.15,96.9) ; D91.4@54.085,124.45 54.085,122.965 ccw(c54.15,122.965) C22.1@54.15,122.9 v1(54.15,121.9) ; D90.4@54.085,149.45 54.085,147.965 ccw(c54.15,147.965) C12.1@54.15,147.9 v1(54.15,146.9) ; D89.4@54.085,174.45 54.085,172.965 ccw(c54.15,172.965) C4.1@54.15,172.9 v1(54.15,171.9) ; R1.1@78,190.15 C18.1@79.4,188.45 C17.1@80.8,188.45 ccw(c81.15,188.45) 81.15,188.1 84.4,188.1 ccw(c84.4,188.4) 84.7,188.4 U1.2@84.7,189.025 ; D104.4@79.085,-0.55 79.085,-2.035 ccw(c79.15,-2.035) C63.1@79.15,-2.1 v1(79.15,-3.1) ; D103.4@79.085,24.45 79.085,22.965 ccw(c79.15,22.965) C55.1@79.15,22.9 v1(79.15,21.9) ; D102.4@79.085,49.45 79.085,47.965 ccw(c79.15,47.965) C47.1@79.15,47.9 v1(79.15,46.9) ; D101.4@79.085,74.45 79.085,72.965 ccw(c79.15,72.965) C39.1@79.15,72.9 v1(79.15,71.9) ; D100.4@79.085,99.45 79.085,97.965 ccw(c79.15,97.965) C31.1@79.15,97.9 v1(79.15,96.9) ; D99.4@79.085,124.45 79.085,122.965 ccw(c79.15,122.965) C23.1@79.15,122.9 v1(79.15,121.9) ; D98.4@79.085,149.45 79.085,147.965 ccw(c79.15,147.965) C13.1@79.15,147.9 v1(79.15,146.9) ; D97.4@79.085,174.45 79.085,172.965 ccw(c79.15,172.965) C5.1@79.15,172.9 v1(79.15,171.9) ; D112.4@104.085,-0.55 104.085,-2.035 ccw(c104.15,-2.035) C64.1@104.15,-2.1 v1(104.15,-3.1) ; D111.4@104.085,24.45 104.085,22.965 ccw(c104.15,22.965) C56.1@104.15,22.9 v1(104.15,21.9) ; D110.4@104.085,49.45 104.085,47.965 ccw(c104.15,47.965) C48.1@104.15,47.9 v1(104.15,46.9) ; D109.4@104.085,74.45 104.085,72.965 ccw(c104.15,72.965) C40.1@104.15,72.9 v1(104.15,71.9) ; D108.4@104.085,99.45 104.085,97.965 ccw(c104.15,97.965) C32.1@104.15,97.9 v1(104.15,96.9) ; D107.4@104.085,124.45 104.085,122.965 ccw(c104.15,122.965) C24.1@104.15,122.9 v1(104.15,121.9) ; D106.4@104.085,149.45 104.085,147.965 ccw(c104.15,147.965) C14.1@104.15,147.9 v1(104.15,146.9) ; D105.4@104.085,174.45 104.085,172.965 ccw(c104.15,172.965) C6.1@104.15,172.9 v1(104.15,171.9) ; D120.4@129.085,-0.55 129.085,-2.035 ccw(c129.15,-2.035) C65.1@129.15,-2.1 v1(129.15,-3.1) ; D119.4@129.085,24.45 129.085,22.965 ccw(c129.15,22.965) C57.1@129.15,22.9 v1(129.15,21.9) ; D118.4@129.085,49.45 129.085,47.965 ccw(c129.15,47.965) C49.1@129.15,47.9 v1(129.15,46.9) ; D117.4@129.085,74.45 129.085,72.965 ccw(c129.15,72.965) C41.1@129.15,72.9 v1(129.15,71.9) ; D116.4@129.085,99.45 129.085,97.965 ccw(c129.15,97.965) C33.1@129.15,97.9 v1(129.15,96.9) ; D115.4@129.085,124.45 129.085,122.965 ccw(c129.15,122.965) C25.1@129.15,122.9 v1(129.15,121.9) ; D114.4@129.085,149.45 129.085,147.965 ccw(c129.15,147.965) C15.1@129.15,147.9 v1(129.15,146.9) ; D113.4@129.085,174.45 129.085,172.965 ccw(c129.15,172.965) C7.1@129.15,172.9 v1(129.15,171.9) ; D128.4@154.085,-0.55 154.085,-2.035 ccw(c154.15,-2.035) C66.1@154.15,-2.1 v1(154.15,-3.1) ; D127.4@154.085,24.45 154.085,22.965 ccw(c154.15,22.965) C58.1@154.15,22.9 v1(154.15,21.9) ; D126.4@154.085,49.45 154.085,47.965 ccw(c154.15,47.965) C50.1@154.15,47.9 v1(154.15,46.9) ; D125.4@154.085,74.45 154.085,72.965 ccw(c154.15,72.965) C42.1@154.15,72.9 v1(154.15,71.9) ; D124.4@154.085,99.45 154.085,97.965 ccw(c154.15,97.965) C34.1@154.15,97.9 v1(154.15,96.9) ; D123.4@154.085,124.45 154.085,122.965 ccw(c154.15,122.965) C26.1@154.15,122.9 v1(154.15,121.9) ; D122.4@154.085,149.45 154.085,147.965 ccw(c154.15,147.965) C16.1@154.15,147.9 v1(154.15,146.9) ; D121.4@154.085,174.45 154.085,172.965 ccw(c154.15,172.965) C8.1@154.15,172.9 v1(154.15,171.9)
  Top Layer w0.5: v1(79.4,187.2) C18.1@79.4,188.45
  Top Layer w1: v1(-23.9,165.6) v1(-19,165.6) v1(6,165.6) v1(31,165.6) v1(56,165.6) v1(81,165.6) v1(106,165.6) v1(131,165.6) v1(156,165.6) ; v1(-20.85,34.537) v1(4.15,34.537) v1(29.15,34.537) v1(54.15,34.537) 61.611,34.537 cw(c61.611,31.997) 63.407,33.793 ccw(c64.946,34.716) 64.946,32.922 69.354,32.922 ccw(c69.354,34.716) 70.893,33.793 cw(c72.689,31.997) 72.689,34.537 v1(79.15,34.537) v1(104.15,34.537) v1(129.15,34.537) v1(154.15,34.537) ; v1(4.15,134.537) v1(29.15,134.537) v1(54.15,134.537) 61.611,134.537 cw(c61.611,131.997) 63.407,133.793 63.856,133.344 ccw(c65.652,135.14) 65.652,132.6 68.648,132.6 ccw(c68.648,135.14) 70.444,133.344 70.893,133.793 cw(c72.689,131.997) 72.689,134.537 v1(79.15,134.537) v1(104.15,134.537) v1(129.15,134.537) v1(154.15,134.537) ; v1(56.07,185.2) P2.2@56.07,193.7
  Bottom Layer w1: v1(-23.9,165.6) -23.9,182.248 cw(c-21.36,182.248) -23.156,184.044 -22.744,184.456 cw(c-20.948,182.66) -20.948,185.2 v1(56.07,185.2) 57.898,185.2 ccw(c57.898,187.74) 59.694,185.944 62.106,188.356 cw(c63.902,186.56) 63.902,189.1 65.6,189.1 ; v1(-20.85,-3.1) -20.85,5.498 cw(c-18.31,5.498) -20.106,7.294 -18.244,9.156 ccw(c-20.04,10.952) -17.5,10.952 -17.5,13.048 ccw(c-20.04,13.048) -18.244,14.844 -20.106,16.706 cw(c-18.31,18.502) -20.85,18.502 v1(-20.85,21.9) v1(-20.85,34.537) v1(-20.85,46.9) -20.85,55.498 cw(c-18.31,55.498) -20.106,57.294 -18.244,59.156 ccw(c-20.04,60.952) -17.5,60.952 -17.5,63.048 ccw(c-20.04,63.048) -18.244,64.844 -20.106,66.706 cw(c-18.31,68.502) -20.85,68.502 v1(-20.85,71.9) v1(-20.85,96.9) -20.85,105.498 cw(c-18.31,105.498) -20.106,107.294 -18.244,109.156 ccw(c-20.04,110.952) -17.5,110.952 -17.5,113.048 ccw(c-20.04,113.048) -18.244,114.844 -20.106,116.706 cw(c-18.31,118.502) -20.85,118.502 v1(-20.85,121.9) v1(-20.85,134.537) v1(-20.85,146.9) -20.85,155.498 cw(c-18.31,155.498) -20.106,157.294 -18.244,159.156 ccw(c-20.04,160.952) -17.5,160.952 -17.5,163.048 ccw(c-20.04,163.048) -18.244,164.844 v1(-19,165.6) -20.106,166.706 cw(c-18.31,168.502) -20.85,168.502 v1(-20.85,171.9) ; v1(4.15,-3.1) 4.15,5.498 cw(c6.69,5.498) 4.894,7.294 6.756,9.156 ccw(c4.96,10.952) 7.5,10.952 7.5,13.048 ccw(c4.96,13.048) 6.756,14.844 4.894,16.706 cw(c6.69,18.502) 4.15,18.502 v1(4.15,21.9) v1(4.15,34.537) v1(4.15,46.9) 4.15,55.498 cw(c6.69,55.498) 4.894,57.294 6.756,59.156 ccw(c4.96,60.952) 7.5,60.952 7.5,63.048 ccw(c4.96,63.048) 6.756,64.844 4.894,66.706 cw(c6.69,68.502) 4.15,68.502 v1(4.15,71.9) v1(4.15,96.9) 4.15,105.498 cw(c6.69,105.498) 4.894,107.294 6.756,109.156 ccw(c4.96,110.952) 7.5,110.952 7.5,113.048 ccw(c4.96,113.048) 6.756,114.844 4.894,116.706 cw(c6.69,118.502) 4.15,118.502 v1(4.15,121.9) v1(4.15,134.537) v1(4.15,146.9) 4.15,155.498 cw(c6.69,155.498) 4.894,157.294 6.756,159.156 ccw(c4.96,160.952) 7.5,160.952 7.5,163.048 ccw(c4.96,163.048) 6.756,164.844 v1(6,165.6) 4.894,166.706 cw(c6.69,168.502) 4.15,168.502 v1(4.15,171.9) ; v1(29.15,-3.1) 29.15,5.498 cw(c31.69,5.498) 29.894,7.294 31.756,9.156 ccw(c29.96,10.952) 32.5,10.952 32.5,13.048 ccw(c29.96,13.048) 31.756,14.844 29.894,16.706 cw(c31.69,18.502) 29.15,18.502 v1(29.15,21.9) v1(29.15,34.537) v1(29.15,46.9) 29.15,55.498 cw(c31.69,55.498) 29.894,57.294 31.756,59.156 ccw(c29.96,60.952) 32.5,60.952 32.5,63.048 ccw(c29.96,63.048) 31.756,64.844 29.894,66.706 cw(c31.69,68.502) 29.15,68.502 v1(29.15,71.9) v1(29.15,96.9) 29.15,105.498 cw(c31.69,105.498) 29.894,107.294 31.756,109.156 ccw(c29.96,110.952) 32.5,110.952 32.5,113.048 ccw(c29.96,113.048) 31.756,114.844 29.894,116.706 cw(c31.69,118.502) 29.15,118.502 v1(29.15,121.9) v1(29.15,134.537) v1(29.15,146.9) 29.15,155.498 cw(c31.69,155.498) 29.894,157.294 31.756,159.156 ccw(c29.96,160.952) 32.5,160.952 32.5,163.048 ccw(c29.96,163.048) 31.756,164.844 29.894,166.706 cw(c31.69,168.502) 29.15,168.502 v1(29.15,171.9) ; v1(54.15,-3.1) 54.15,5.498 cw(c56.69,5.498) 54.894,7.294 56.756,9.156 ccw(c54.96,10.952) 57.5,10.952 57.5,13.048 ccw(c54.96,13.048) 56.756,14.844 54.894,16.706 cw(c56.69,18.502) 54.15,18.502 v1(54.15,21.9) v1(54.15,34.537) v1(54.15,46.9) 54.15,55.498 cw(c56.69,55.498) 54.894,57.294 56.756,59.156 ccw(c54.96,60.952) 57.5,60.952 57.5,63.048 ccw(c54.96,63.048) 56.756,64.844 54.894,66.706 cw(c56.69,68.502) 54.15,68.502 v1(54.15,71.9) v1(54.15,96.9) 54.15,105.498 cw(c56.69,105.498) 54.894,107.294 56.756,109.156 ccw(c54.96,110.952) 57.5,110.952 57.5,113.048 ccw(c54.96,113.048) 56.756,114.844 54.894,116.706 cw(c56.69,118.502) 54.15,118.502 v1(54.15,121.9) v1(54.15,134.537) v1(54.15,146.9) 54.15,155.498 cw(c56.69,155.498) 54.894,157.294 56.756,159.156 ccw(c54.96,160.952) 57.5,160.952 57.5,163.048 ccw(c54.96,163.048) 56.756,164.844 v1(56,165.6) 54.894,166.706 cw(c56.69,168.502) 54.15,168.502 v1(54.15,171.9) ; v1(65.6,190.2) 65.6,189.1 ; v1(69.4,190.271) 69.4,189.1 ; v1(79.15,-3.1) 79.15,5.498 cw(c81.69,5.498) 79.894,7.294 81.756,9.156 ccw(c79.96,10.952) 82.5,10.952 82.5,13.048 ccw(c79.96,13.048) 81.756,14.844 79.894,16.706 cw(c81.69,18.502) 79.15,18.502 v1(79.15,21.9) v1(79.15,34.537) v1(79.15,46.9) 79.15,55.498 cw(c81.69,55.498) 79.894,57.294 81.756,59.156 ccw(c79.96,60.952) 82.5,60.952 82.5,63.048 ccw(c79.96,63.048) 81.756,64.844 79.894,66.706 cw(c81.69,68.502) 79.15,68.502 v1(79.15,71.9) v1(79.15,96.9) 79.15,105.498 cw(c81.69,105.498) 79.894,107.294 81.756,109.156 ccw(c79.96,110.952) 82.5,110.952 82.5,113.048 ccw(c79.96,113.048) 81.756,114.844 79.894,116.706 cw(c81.69,118.502) 79.15,118.502 v1(79.15,121.9) v1(79.15,134.537) v1(79.15,146.9) 79.15,155.498 cw(c81.69,155.498) 79.894,157.294 81.756,159.156 ccw(c79.96,160.952) 82.5,160.952 82.5,163.048 ccw(c79.96,163.048) 81.756,164.844 v1(81,165.6) 79.894,166.706 cw(c81.69,168.502) 79.15,168.502 v1(79.15,171.9) ; v1(79.4,187.2) 75.352,187.2 cw(c75.352,189.74) 73.556,187.944 73.144,188.356 ccw(c71.348,186.56) 71.348,189.1 69.4,189.1 ; v1(104.15,-3.1) 104.15,5.498 cw(c106.69,5.498) 104.894,7.294 106.756,9.156 ccw(c104.96,10.952) 107.5,10.952 107.5,13.048 ccw(c104.96,13.048) 106.756,14.844 104.894,16.706 cw(c106.69,18.502) 104.15,18.502 v1(104.15,21.9) v1(104.15,34.537) v1(104.15,46.9) 104.15,55.498 cw(c106.69,55.498) 104.894,57.294 106.756,59.156 ccw(c104.96,60.952) 107.5,60.952 107.5,63.048 ccw(c104.96,63.048) 106.756,64.844 104.894,66.706 cw(c106.69,68.502) 104.15,68.502 v1(104.15,71.9) v1(104.15,96.9) 104.15,105.498 cw(c106.69,105.498) 104.894,107.294 106.756,109.156 ccw(c104.96,110.952) 107.5,110.952 107.5,113.048 ccw(c104.96,113.048) 106.756,114.844 104.894,116.706 cw(c106.69,118.502) 104.15,118.502 v1(104.15,121.9) v1(104.15,134.537) v1(104.15,146.9) 104.15,155.498 cw(c106.69,155.498) 104.894,157.294 106.756,159.156 ccw(c104.96,160.952) 107.5,160.952 107.5,163.048 ccw(c104.96,163.048) 106.756,164.844 v1(106,165.6) 104.894,166.706 cw(c106.69,168.502) 104.15,168.502 v1(104.15,171.9) ; v1(129.15,-3.1) 129.15,5.498 cw(c131.69,5.498) 129.894,7.294 131.756,9.156 ccw(c129.96,10.952) 132.5,10.952 132.5,13.048 ccw(c129.96,13.048) 131.756,14.844 129.894,16.706 cw(c131.69,18.502) 129.15,18.502 v1(129.15,21.9) v1(129.15,34.537) v1(129.15,46.9) 129.15,55.498 cw(c131.69,55.498) 129.894,57.294 131.756,59.156 ccw(c129.96,60.952) 132.5,60.952 132.5,63.048 ccw(c129.96,63.048) 131.756,64.844 129.894,66.706 cw(c131.69,68.502) 129.15,68.502 v1(129.15,71.9) v1(129.15,96.9) 129.15,105.498 cw(c131.69,105.498) 129.894,107.294 131.756,109.156 ccw(c129.96,110.952) 132.5,110.952 132.5,113.048 ccw(c129.96,113.048) 131.756,114.844 129.894,116.706 cw(c131.69,118.502) 129.15,118.502 v1(129.15,121.9) v1(129.15,134.537) v1(129.15,146.9) 129.15,155.498 cw(c131.69,155.498) 129.894,157.294 131.756,159.156 ccw(c129.96,160.952) 132.5,160.952 132.5,163.048 ccw(c129.96,163.048) 131.756,164.844 129.894,166.706 cw(c131.69,168.502) 129.15,168.502 v1(129.15,171.9) ; v1(154.15,-3.1) 154.15,5.498 cw(c156.69,5.498) 154.894,7.294 156.756,9.156 ccw(c154.96,10.952) 157.5,10.952 157.5,13.048 ccw(c154.96,13.048) 156.756,14.844 154.894,16.706 cw(c156.69,18.502) 154.15,18.502 v1(154.15,21.9) v1(154.15,34.537) v1(154.15,46.9) 154.15,55.498 cw(c156.69,55.498) 154.894,57.294 156.756,59.156 ccw(c154.96,60.952) 157.5,60.952 157.5,63.048 ccw(c154.96,63.048) 156.756,64.844 154.894,66.706 cw(c156.69,68.502) 154.15,68.502 v1(154.15,71.9) v1(154.15,96.9) 154.15,105.498 cw(c156.69,105.498) 154.894,107.294 156.756,109.156 ccw(c154.96,110.952) 157.5,110.952 157.5,113.048 ccw(c154.96,113.048) 156.756,114.844 154.894,116.706 cw(c156.69,118.502) 154.15,118.502 v1(154.15,121.9) v1(154.15,134.537) v1(154.15,146.9) 154.15,155.498 cw(c156.69,155.498) 154.894,157.294 156.756,159.156 ccw(c154.96,160.952) 157.5,160.952 157.5,163.048 ccw(c154.96,163.048) 156.756,164.844 154.894,166.706 cw(c156.69,168.502) 154.15,168.502 v1(154.15,171.9) ; 65.6,189.1 69.4,189.1
pads on no net: CZ1.0 CZ2.0 CZ3.0 CZ4.0 J1.0 J1.A8 J1.B8 U1.1 U1.11 U1.13 U1.14 U1.15 U1.28

## Polygon pours and split planes (outlines as drawn)
GND on Top Layer "NONET_L-01_P-001" (solid, remove dead copper, pour order 1): -37,195 172,195 172,-17 -37,-17
GND on Bottom Layer "NONET_L-01_P-001" (solid, remove dead copper, pour order 0): -37,196.1 172,196.1 172,-17 -37,-17

## Keep-outs
Bottom Layer:
  circle w0.254: c65,-10 r3
  circle w0.254: c70,-10 r3
  circle w0.254: c-30,90 r3
  circle w0.254: c-30,85 r3
  circle w0.254: c165,90 r3
  circle w0.254: c165,85 r3
  circle w0.254: c70,185 r3
  circle w0.254: c65,185 r3
  circle w0.254: c70,85 r3
  circle w0.254: c70,90 r3
  circle w0.254: c65,90 r3
  circle w0.254: c65,85 r3
Keep-Out Layer:
  circle w0.254: c67.5,37.5 r3.1
  circle w0.254: c67.5,137.5 r3.1
  circle w0.254: c-30,-10 r3.1
  circle w0.254: c165,-10 r3.1
  circle w0.254: c165,185 r3.1
  circle w0.254: c-30,185 r3.1

## Other copper
Top Layer:
  region net VUSB: 70.2,188.125 70.2,189.625 ccw(c70.079,189.625) 70.165,189.71 69.849,190.026 cw(c70.147,190.325) 69.725,190.325 ccw(c69.45,190.325) 69.45,190.6 69.4,190.6 ccw(c69.4,190.25) 69.05,190.25 69.05,190.125 ccw(c69.4,190.125) 69.306,189.788 cw(c69.306,189.494) 69.6,189.494 69.6,188.125
  region net VUSB: 64.8,188.125 64.8,189.625 cw(c64.921,189.625) 64.835,189.71 65.151,190.026 ccw(c64.853,190.325) 65.275,190.325 cw(c65.55,190.325) 65.55,190.6 65.6,190.6 cw(c65.6,190.25) 65.95,190.25 65.95,190.125 cw(c65.6,190.125) 65.694,189.788 ccw(c65.694,189.494) 65.4,189.494 65.4,188.125
  region net GND: 70.4,188.1 70.4,189.6 71.1,189.6 ccw(c71.1,190.1) 71.6,190.1 71.6,190.5 73.5,190.5 73.5,188.3 cw(c72.9,188.3) 72.9,187.7 70.8,187.7 cw(c70.8,188.1)
  region net GND: 64.6,188.1 64.6,189.6 63.9,189.6 cw(c63.9,190.1) 63.4,190.1 63.4,190.5 61.5,190.5 61.5,188.3 ccw(c62.1,188.3) 62.1,187.7 64.2,187.7 ccw(c64.2,188.1)

## Silkscreen, mask and mechanical layers (free items; w line width, h text height)
Top Overlay:
  drawing of 10 lines, arcs and shapes, not listed
  text "DIO" at 74.892,192.681 h1.5 r90
  text "DCK" at 81.092,192.49 h1.5 r90
  text "+5V" at 54.592,192.065 h1.5 r90
  text "GND" at 60.792,191.6 h1.5 r90
  text "Wim" at 96.5,188.3 h2 r9
  text "BErt" at 103.3,188.1 h2 r9
  text ".PCB_TITLE Rev..PCB_Rev" at -19.7,186.8 h2.8
Bottom Overlay:
  text "This side was intentionally left blank." at 172,74.5 h9
Outline:
  lines w0.15: -30.01,-17 165,-17 ccw(c165,-10) 172,-10 172,185 ccw(c165,185) 165,192 92.5,192 90.77,192 cw(c90.77,193.27) 89.5,193.27 89.5,193.73 ccw(c88.23,193.73) 88.23,195 67.5,195 46.77,195 ccw(c46.77,193.73) 45.5,193.73 45.5,193.27 cw(c44.23,193.27) 44.23,192 42.5,192 -30,192 ccw(c-30,185) -37,185 -37,-10 ccw(c-30,-10) -30,-17
Fabrication:
  text "1.6mm Thickness" at -14.25,-19.5 h1.5
Frame:
  drawing of 15 lines, arcs and shapes, not listed
  text "Document" at 260.402,-31.311 h2
  text ".PCB_TITLE" at 261.902,-36.811 h3.2
  text "Layer Name" at 260.402,-41.311 h2
  text "<DISABLED>" at 264.902,-46.311 h3.5
  text "Date" at 260.402,-51.311 h2
  text "Rev" at 300.402,-51.311 h2
  text ".Print_Date" at 263.402,-56.811 h3.5
  text ".PCB_REV" at 304.902,-56.811 h4
  text "Desginer" at 210.402,-61.311 h2
  text "Document" at 260.402,-61.311 h2
  text ".Pcb_File_Name_No_Path" at 261.902,-66.311 h1.5
  text ".PCB_ENGINEER" at 214.902,-66.811 h4
Drill Drawing:
  circle w0.15: c181.59,37.31 r0.444
  lines w0.15: 180.343,30.266 307.695,30.266 ; 180.343,42.266 307.695,42.266 ; 187.742,28.266 187.742,44.266 ; 195.773,28.266 195.773,44.266 ; 211.135,28.266 211.135,44.266 ; 217.933,28.266 217.933,44.266 ; 227.771,28.266 227.771,44.266 ; 247.798,28.266 247.798,44.266 ; 255.716,28.266 255.716,44.266 ; 265.713,28.266 265.713,44.266 ; 277.344,28.266 277.344,44.266 ; 288.94,28.266 288.94,44.266 ; 180.343,28.266 307.695,28.266 307.695,44.266 180.343,44.266 180.343,28.266 ; 181.146,31.755 182.035,31.755 181.59,30.866 181.146,31.755 ; 181.146,32.866 182.035,32.866 182.035,33.755 181.146,33.755 181.146,32.866 ; 181.146,35.088 181.368,35.088 181.368,34.866 181.812,34.866 181.812,35.088 182.035,35.088 182.035,35.532 181.812,35.532 181.812,35.755 181.368,35.755 181.368,35.532 181.146,35.532 181.146,35.088 ; 181.146,38.866 181.59,39.088 182.035,38.866 181.812,39.31 182.035,39.755 181.59,39.532 181.146,39.755 181.368,39.31 181.146,38.866 ; 181.146,41.088 181.368,41.088 181.59,40.866 181.812,41.088 182.035,41.088 181.812,41.31 182.035,41.532 181.812,41.532 181.59,41.755 181.368,41.532 181.146,41.532 181.368,41.31 181.146,41.088
  text "Symbol" at 181.543,42.866 h0.96
  text "Count" at 188.342,42.866 h0.96
  text "Hole Size" at 196.373,42.866 h0.96
  text "Plated" at 211.735,42.866 h0.96
  text "Hole Type" at 218.533,42.866 h0.96
  text "Drill Layer Pair" at 228.371,42.866 h0.96
  text "Via/Pad" at 248.398,42.866 h0.96
  text "Pad Shape" at 256.316,42.866 h0.96
  text "Template" at 266.313,42.866 h0.96
  text "Hole Length" at 277.944,42.866 h0.96
  text "Routed Path Length" at 289.54,42.866 h0.96
  text "2" at 188.342,40.866 h0.8
  text "0.650mm (25.59mil)" at 196.373,40.866 h0.8
  text "NPTH" at 211.735,40.866 h0.8
  text "Round" at 218.533,40.866 h0.8
  text "Top Layer - Bottom Layer" at 228.371,40.866 h0.8
  text "Pad" at 248.398,40.866 h0.8
  text "Rounded" at 256.316,40.866 h0.8
  text "c65hn65" at 266.313,40.866 h0.8
  text "-" at 277.944,40.866 h0.8
  text "-" at 289.54,40.866 h0.8
  text "4" at 188.342,38.866 h0.8
  text "0.900mm (35.43mil)" at 196.373,38.866 h0.8
  text "PTH" at 211.735,38.866 h0.8
  text "Round" at 218.533,38.866 h0.8
  text "Top Layer - Bottom Layer" at 228.371,38.866 h0.8
  text "Pad" at 248.398,38.866 h0.8
  text "(Mixed)" at 256.316,38.866 h0.8
  text "(Mixed)" at 266.313,38.866 h0.8
  text "-" at 277.944,38.866 h0.8
  text "-" at 289.54,38.866 h0.8
  text "6" at 188.342,36.866 h0.8
  text "3.200mm (125.98mil)" at 196.373,36.866 h0.8
  text "NPTH" at 211.735,36.866 h0.8
  text "Round" at 218.533,36.866 h0.8
  text "Top Layer - Bottom Layer" at 228.371,36.866 h0.8
  text "Pad" at 248.398,36.866 h0.8
  text "Rounded" at 256.316,36.866 h0.8
  text "c320hn320m620" at 266.313,36.866 h0.8
  text "-" at 277.944,36.866 h0.8
  text "-" at 289.54,36.866 h0.8
  text "8" at 188.342,34.866 h0.8
  text "3.100mm (122.05mil)" at 196.373,34.866 h0.8
  text "NPTH" at 211.735,34.866 h0.8
  text "Round" at 218.533,34.866 h0.8
  text "Top Layer - Bottom Layer" at 228.371,34.866 h0.8
  text "Pad" at 248.398,34.866 h0.8
  text "Rounded" at 256.316,34.866 h0.8
  text "c310hn310" at 266.313,34.866 h0.8
  text "-" at 277.944,34.866 h0.8
  text "-" at 289.54,34.866 h0.8
  text "68" at 188.342,32.866 h0.8
  text "3.000mm (118.11mil)" at 196.373,32.866 h0.8
  text "NPTH" at 211.735,32.866 h0.8
  text "Round" at 218.533,32.866 h0.8
  text "Top Layer - Bottom Layer" at 228.371,32.866 h0.8
  text "Pad" at 248.398,32.866 h0.8
  text "Rounded" at 256.316,32.866 h0.8
  text "c300hn300" at 266.313,32.866 h0.8
  text "-" at 277.944,32.866 h0.8
  text "-" at 289.54,32.866 h0.8
  text "451" at 188.342,30.866 h0.8
  text "0.250mm (9.84mil)" at 196.373,30.866 h0.8
  text "PTH" at 211.735,30.866 h0.8
  text "Round" at 218.533,30.866 h0.8
  text "Top Layer - Bottom Layer" at 228.371,30.866 h0.8
  text "Via" at 248.398,30.866 h0.8
  text "Rounded" at 256.316,30.866 h0.8
  text "v60h25m45" at 266.313,30.866 h0.8
  text "-" at 277.944,30.866 h0.8
  text "-" at 289.54,30.866 h0.8
  text "539 Total" at 188.342,28.866 h0.8

## Dimensions
172,185 to -37,185 on Fabrication
67.5,195 to -30.01,-17 on Fabrication